# Altium PCB LED_Al.PcbDoc
Units mm, origin at the board's own origin, x right, y up, seen from the top; angles counter-clockwise.
Board outline 104.14 x 127 mm, 2 copper layers (Top Layer, Bottom Layer); 16 components, 29 nets, 82 pads, 0 vias.
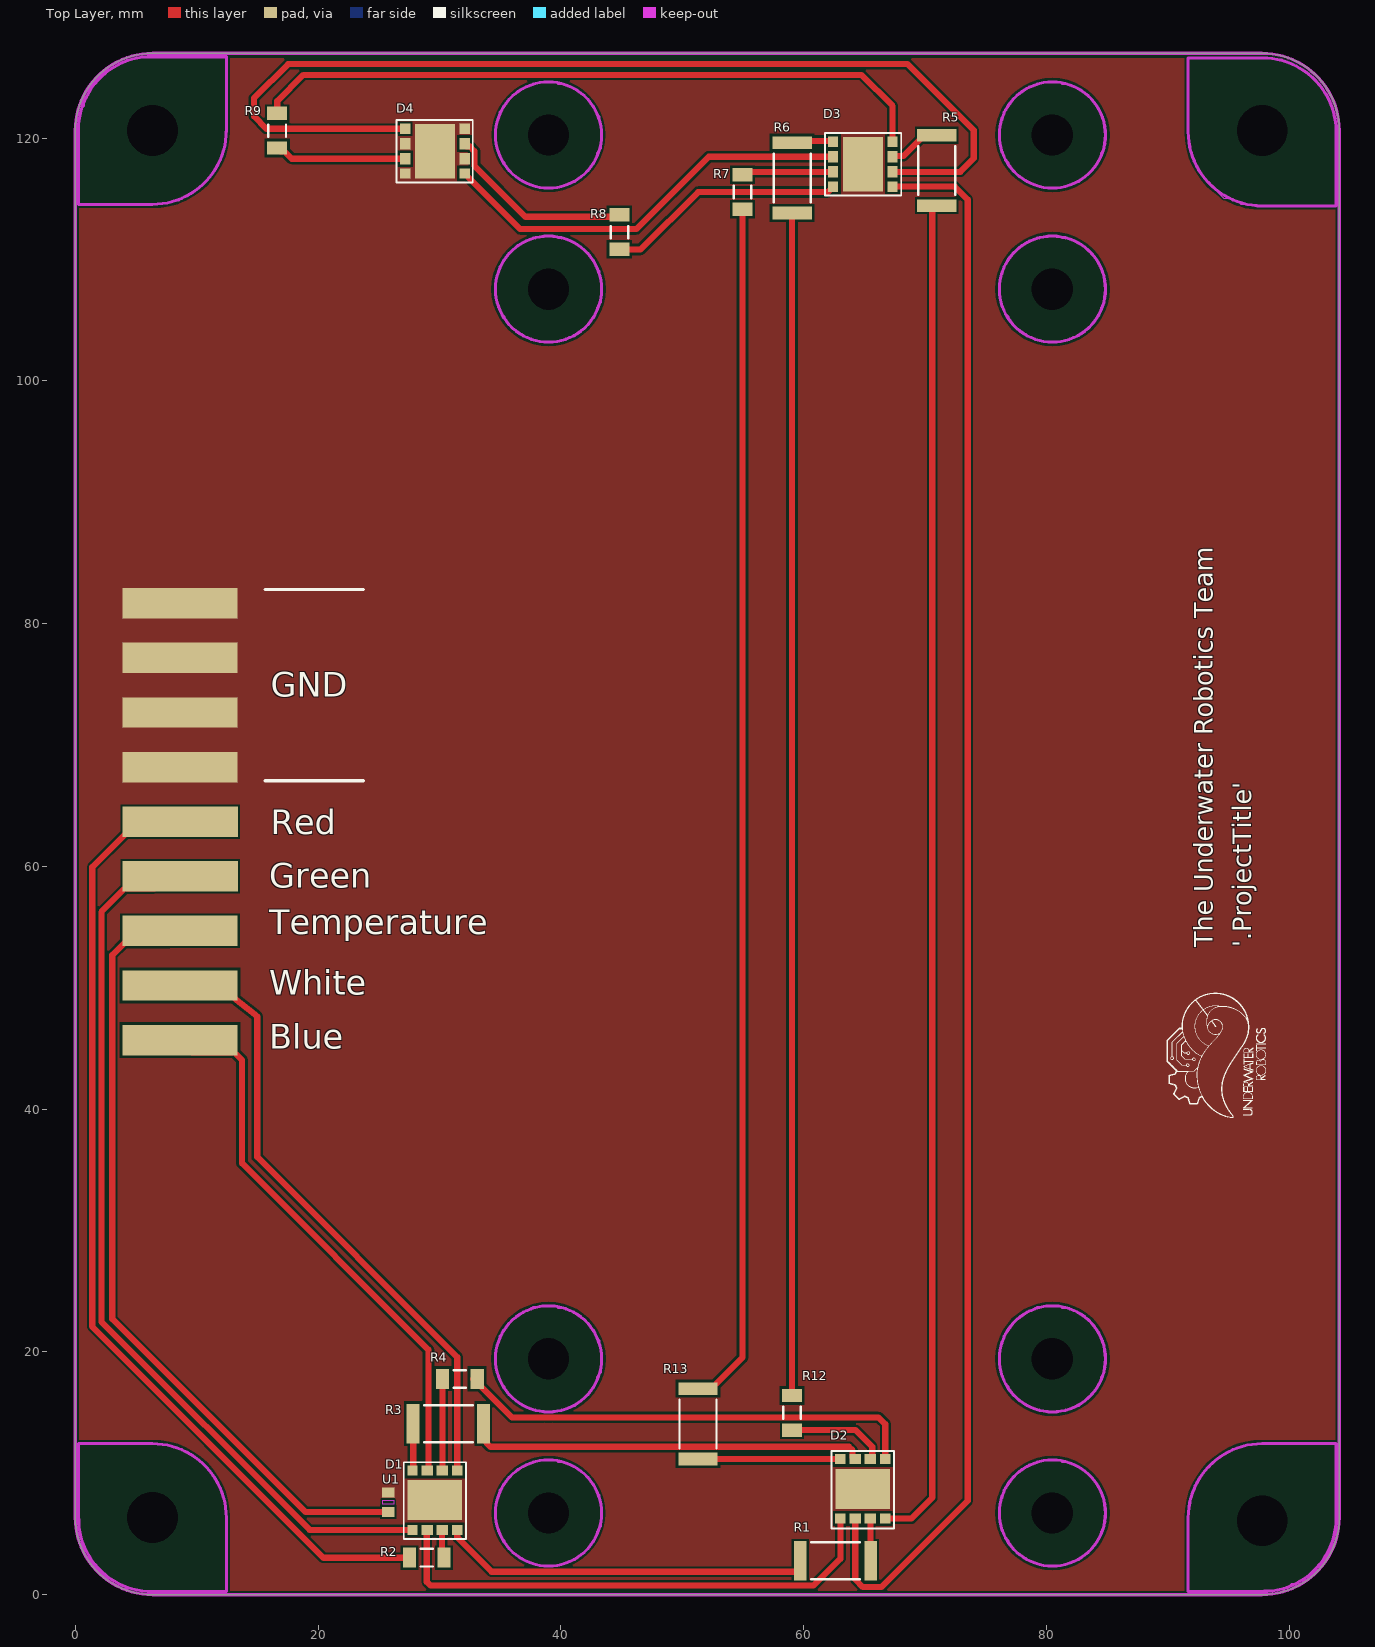
[diagram p0: Top Layer view]
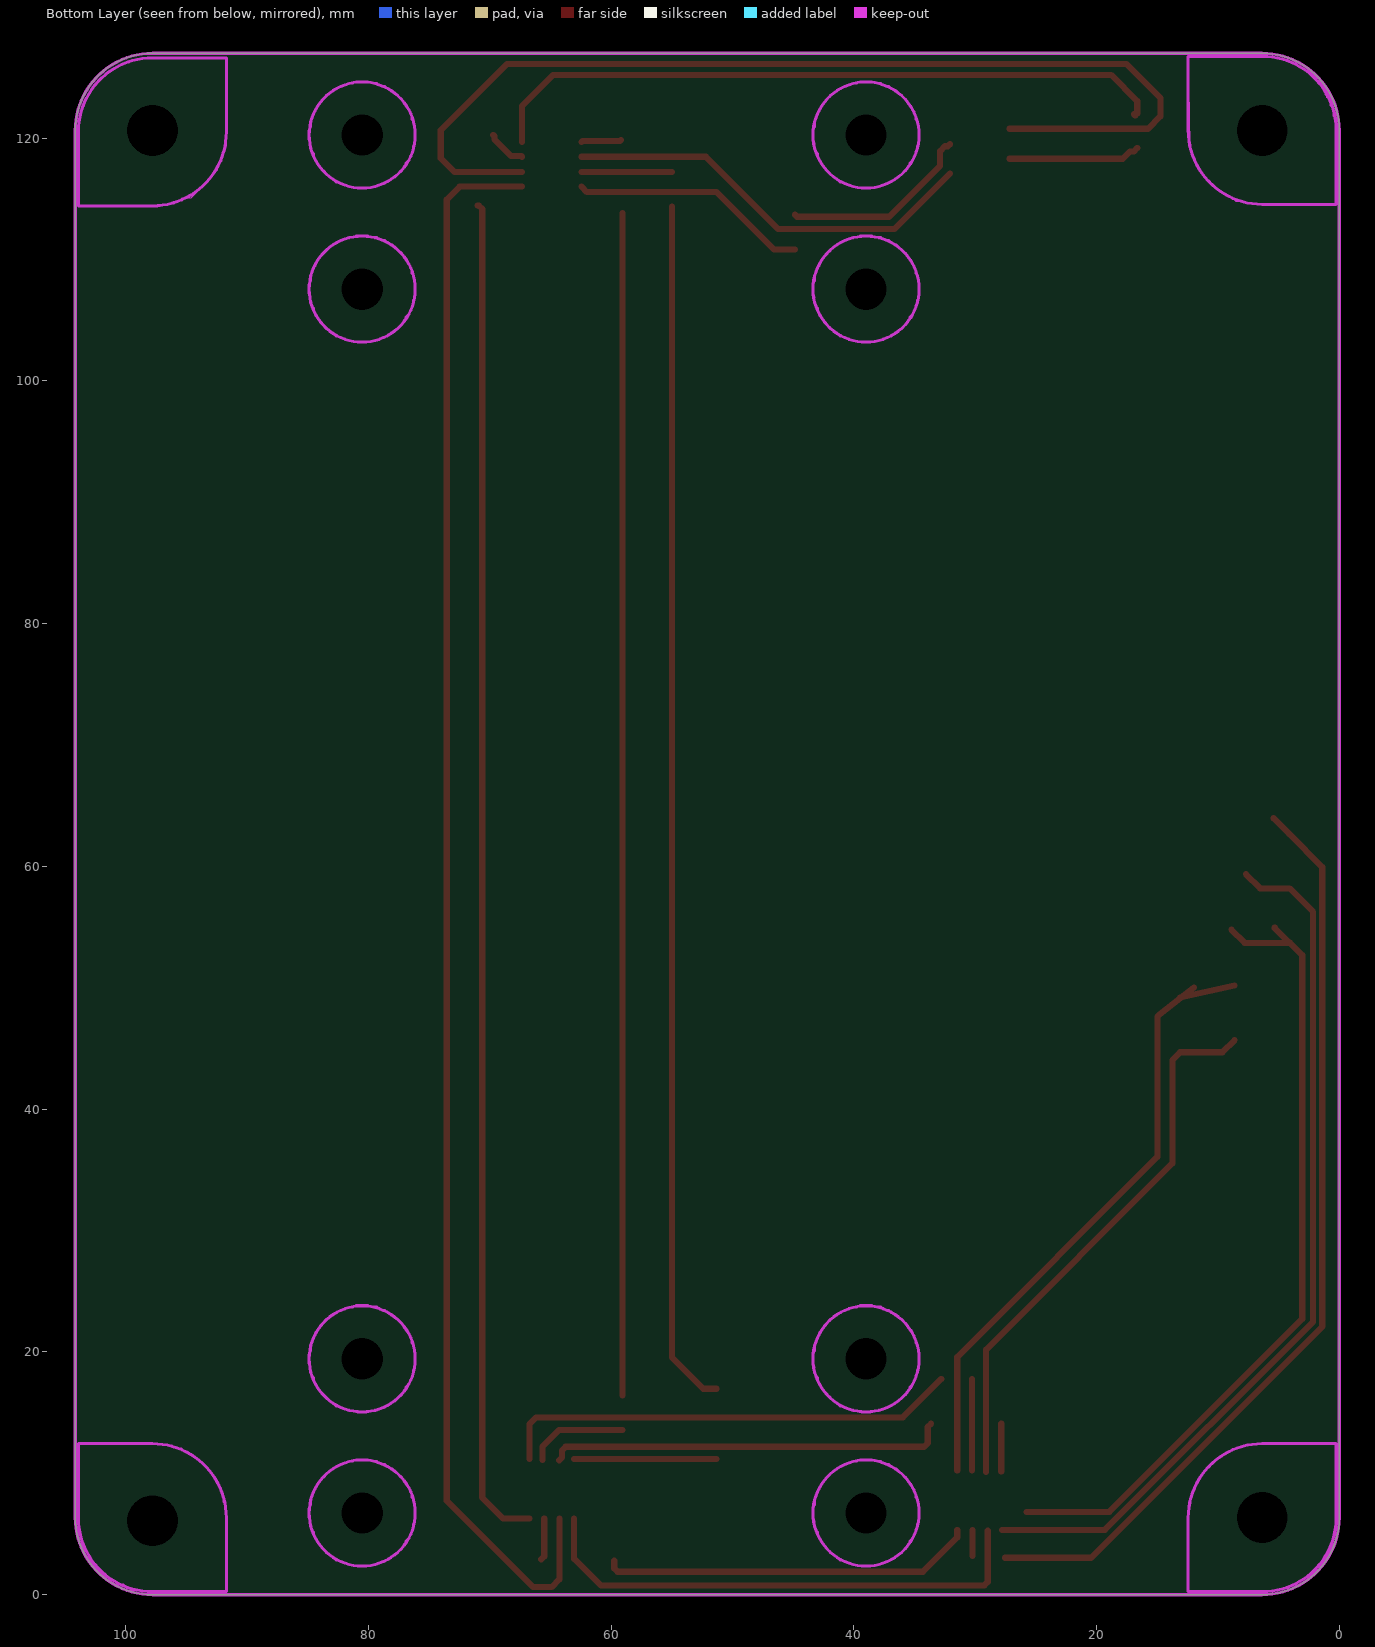
[diagram p1: Bottom Layer view, seen from below]

## Layer stack, top to bottom
Top Solder: solder mask 0.0102, Solder Resist, Dk 3.5
Top Layer: signal copper 0.0356
Dielectric 1: dielectric 0.32, FR-4, Dk 4.8
Bottom Layer: signal copper 0.0356
Bottom Solder: solder mask 0.0102, Solder Resist, Dk 3.5

## Board outline
0,6.35 0,120.65 cw(c6.35,120.65) 6.35,127 97.79,127 cw(c97.79,120.65) 104.14,120.65 104.14,6.35 cw(c97.79,6.35) 97.79,0 6.35,0 cw(c6.35,6.35)

## Design rules (kind name [scope] priority, off if disabled: settings)
AcuteAngle [All] p1: minimum=6.00000000000000E+0001 checktracksonly=FALSE
BoardOutlineClearance "BoardOutlineClearance JLCPCB" [All] p1: gap=0.2 ignorepadtopadclearanceinfootprint=FALSE
Clearance "Clearance JLCPCB 4 layer" [All] p1: gap=0.2 ignorepadtopadclearanceinfootprint=FALSE except(0.09: Arc-Arc Arc-Track Track-Track; 0.127: Arc-SMDPad Track-SMDPad SMDPad-SMDPad; 0.254: Arc-Hole Track-Hole SMDPad-Hole THPad-Hole Via-Hole Fill-Hole Poly-Hole Region-Hole Text-Hole)
DiffPairsRouting [All] p1: maxlimit=0.254 minlimit=0.152 mostfreqgap=0.203 toplayer_minwidth=0.09 toplayer_maxwidth=0.381 toplayer_prefwidth=0.203 bottomlayer_minwidth=0.09 bottomlayer_maxwidth=0.381 bottomlayer_prefwidth=0.203 maxuncoupledlength=12.7
HoleSize "HoleSize JLCPCB Pad" [IsPad] p1: absolutevalues=TRUE maxlimit=6.3 minlimit=0.5 maxpercent=80.000 minpercent=20.000
HoleSize "HoleSize JLCPCB 4 layer" [All] p2: absolutevalues=TRUE maxlimit=6.3 minlimit=0.2 maxpercent=80.000 minpercent=20.000
HoleToHoleClearance "HoleToHoleClearance JLCPCB" [All] p1: gap=0.254 allowstackedmicrovias=TRUE
MinimumAnnularRing "MinimumAnnularRing JLCPCB Pad" [IsPad] p1: minimumring=0.3
MinimumAnnularRing "MinimumAnnularRing JLCPCB 1oz" [All] p2: minimumring=0.13
MinimumSolderMaskSliver [All] p1: minsoldermaskwidth=0.025
PlaneConnect [All] p1: pad.planeconnectstyle=Relief pad.reliefexpansion=0.508 pad.reliefentries=4 pad.reliefconductorwidth=0.254 pad.reliefairgap=0.254 via.planeconnectstyle=Direct via.reliefexpansion=0.508 via.reliefentries=4 via.reliefconductorwidth=0.254 via.reliefairgap=0.254
PolygonConnect [All] p1: connectstyle=Direct reliefconductorwidth=0.381 reliefentries=4 polygonreliefangle="45 Angle" airgapwidth=0.254
RoutingVias "RoutingVias JLCPCB 4 layer" [All] p1: holewidth=0.5 width=1 viastyle="Through Hole" minholewidth=0.2 minwidth=0.4 maxholewidth=1.27 maxwidth=2.032
SilkToSilkClearance [All] p1: silktosilkclearance=0.076
SilkToSolderMaskClearance "SilkToSolderMaskClearance JLCPCB" [IsPad] p1: minsilkscreentomaskgap=0.15 clearancetoexposedcopper=TRUE
SolderMaskExpansion "SolderMaskExpansion JLCPCB" [All] p1: expansion=0.05 istentingtop=FALSE
Width "Width JLCPCB 4 layer" [All] p1: maxlimit=5 minlimit=0.09 preferedwidth=0.508 bottomlayer_prefwidth=0.25 minimp=50.000000 maximp=50.000000 favimp=50.000000
23 further rules are at their usual default settings.

## Components (designator, comment, footprint, x,y, rotation, side; value= is the part's Value field where it differs from the comment)
D1 "LE_RTDUW_S2WM" LE_RTDUW_S2WM 29.629,7.785 r0 top
D2 "LE_RTDUW_S2WM" LE_RTDUW_S2WM 64.883,8.725 r0 top
D3 "LE_RTDUW_S2WM" LE_RTDUW_S2WM 64.883,117.856 r90 top
D4 "LE_RTDUW_S2WM" LE_RTDUW_S2WM 29.629,118.933 r270 top
R1 "Jumper 2512(6432)" RESC2512(6432)_L 62.632,2.794 r180 top value="0.00 Ohm"
R2 "ERJ-8GEY0R00V" RESC3216X70X50NL05T20 28.956,3.048 r0 top
R3 "Jumper 2512(6432)" RESC2512(6432)_L 30.734,14.097 r0 top value="0.00 Ohm"
R4 "ERJ-8GEY0R00V" RESC3216X70X50NL05T20 31.679,17.78 r0 top
R5 "Jumper 2512(6432)" RESC2512(6432)_L 70.979,117.348 r270 top value="0.00 Ohm"
R6 "Jumper 2512(6432)" RESC2512(6432)_L 59.055,116.734 r90 top value="0.00 Ohm"
R7 "ERJ-8GEY0R00V" RESC3216X70X50NL05T20 54.977,115.57 r90 top
R8 "ERJ-8GEY0R00V" RESC3216X70X50NL05T20 44.831,112.268 r90 top
R9 "ERJ-8GEY0R00V" RESC3216X70X50NL05T20 16.637,120.622 r90 top
R12 "ERJ-8GEY0R00V" RESC3216X70X50NL05T20 59.055,14.986 r90 top
R13 "Jumper 2512(6432)" RESC2512(6432)_L 51.308,14.076 r90 top value="0.00 Ohm"
U1 "NTCS0603E3223FMT" NTCS0603_VIS 25.781,7.62 r90 top

## Footprints (in the part's own frame and the unit in brackets; to place one, negate y for a bottom-side part, rotate by r counter-clockwise, add the part's x,y. Pads: shape width x height; smd on the part's side, far side on the other; paste and mask are expansions set on the pad)
LE_RTDUW_S2WM [mil]
  rect 33.5x33.5 smd: 1(72.6,-96.5) 4(-72.6,-96.5) 5(-72.6,96.5) 8(72.6,96.5)
  rect 37.4x33.5 smd: 2(24.6,-96.5) 3(-24.6,-96.5) 6(-24.6,96.5) 7(24.6,96.5)
  rect 177.17x129.92 smd: 9(0,0)
  silkscreen extent -101,-125 101,123, body extent -93,-113 91,113, height 52
NTCS0603_VIS [mm]
  rect 0.8x1 smd paste+0 mask+0: 1(-0.8,0) 2(0.8,0)
  Top Layer keep-out region: -0.176,-0.441 -0.176,0.457 0.168,0.457 0.168,-0.441
  body extent -0.88,-0.47 0.88,0.47, height 0.94
RESC2512(6432)_L [mm] "Chip Resistor, Body 6.4x3.2mm, IPC High Density"
  rect 1.05x3.25 smd: 1(-2.9,0) 2(2.9,0)
  silkscreen extent -2,-1.52 2,1.53, body extent -3.25,-1.7 3.25,1.7, height 0.75
RESC3216X70X50NL05T20 [mm] "Chip Resistor, 2-Leads, Body 3.20x1.60mm, IPC Medium Density"
  rect 1.1x1.65 smd: 1(-1.425,0) 2(1.425,0)
  silkscreen extent -0.5,-0.72 0.5,0.72, body extent -1.63,-0.82 1.62,0.82, height 0.7

## Part data
D1 D2 D3 D4: "LED OSTAR RGBW 625/527/453NM SMD", Supplier Part Number 1=720-LERTDUWS2WMA2120, Supplier 1=Mouser
R1 R3 R5 R6 R13: library part CMP-1018-00001-1, "Jumper 2512 (6432 Metric)", Case-EIA=2512, Case-Metric=6432, Power=None, Technology=SMT, Tolerance=None
R2 R4 R7 R8 R9 R12: library part CMP-2003-00541-1, Manufacturer=Panasonic, Part Number=ERJ-8GEY0R00V
U1: library part CMP-00030-42631939-1, "NTCS0603E3223FMT Thermistor NTC 22K Ohm 1% 2-Pin 0603 Surface Mount Solder Pad 3730K -4.5 to -4 T/R Automotive", Case Code (Imperial)=0603, Case Code (Metric)=1608, Max Operating Temperature=150°C, Min Operating Temperature=-40°C, Power Dissipation=125mW, Resistance=22kΩ, Tolerance=1%, Accuracy=1%, Case/Package=0603, Contact Plating=Tin, Depth=800µm, Height=800µm, Length=1.6mm, Mount="Surface Mount", NexarPartId=42631939, Number of Pins=2, Power Rating=125mW, Radiation Hardening=No, REACH SVHC=Unknown, RoHS=Compliant, Schedule B="8533400080, 8533400080", Termination=SMD/SMT, Width=1.6mm

## Free pads (board coordinates)
  round 0 hole 4.191 unplated: 1(6.35,6.35) 1(6.35,120.65) 1(97.79,6.096) 1(97.79,120.65)
  round 0 hole 3.404 unplated: 1(38.989,6.731) 1(38.989,19.431) 1(38.989,107.569) 1(38.989,120.269) 1(80.505,6.731) 1(80.505,19.431) 1(80.505,107.569) 1(80.505,120.269)
  rect 9.5x2.5 smd: 2(8.629,45.696) 2(8.63,50.196) 2(8.633,54.695) 2(8.634,81.687) 2(8.634,77.188) 2(8.635,72.688) 2(8.635,68.189) 2(8.636,63.69) 2(8.636,63.69) 2(8.637,59.191)

## Nets (pads, with @x,y where several pads share a name; then routed paths per layer and width w, separated by ;. In a path a pad name is that pad's centre, name@x,y a point inside that pad or via, vN(x,y) a via of type N, cw(c..) or ccw(c..) an arc to the next point about the centre after c; other vN are vias at no path point)
"Blue Anode": D1.6 pad.2@8.629,45.696 | length 46.1
  Top Layer w0.508: pad.2@8.629,45.696 9.625,44.7 13.125,44.7 13.125,44.66 13.74,44.045 13.74,35.536 29.093,20.183 D1.6@29.093,10.116
"Blue D1D2": D2.6 R3.2 | length 33
  Top Layer w0.508: R3.2 33.905,13.826 33.905,12.49 34.203,12.192 63.74,12.192 64.037,11.894 64.037,11.308 D2.6@64.262,11.084
"Blue D2D3": D3.6 R7.2 | length 7.5
  Top Layer w0.508: R7.2@54.977,117.231 D3.6
"Blue D3D4": D4.6 R8.2 | length 16
  Top Layer w0.508: D4.6@32.08,119.508 32.252,119.337 32.491,119.337 32.887,118.941 32.887,117.735 37.084,113.538 44.676,113.538 R8.2
GND: D1.9 D2.9 D3.9 D4.1 D4.3 D4.5 D4.7 D4.9 pad.2@8.634,77.188 pad.2@8.634,81.687 pad.2@8.635,68.189 pad.2@8.635,72.688 U1.2
"Green Anode": D1.4 pad.2@8.637,59.191 | length 73.3
  Top Layer w0.508: pad.2@7.686,59.372 6.509,58.195 4.093,58.195 2.159,56.261 2.159,22.479 19.304,5.334 D1.4
"Green D1D2": D1.3 D2.4 | length 42.6
  Top Layer w0.508: D1.3@28.956,5.264 28.956,1.06 29.254,0.762 60.833,0.762 63.039,2.968 D2.4
"Green D2D3": D2.3 D3.4 | length 131.3
  Top Layer w0.508: D2.3 64.258,1.274 64.897,0.635 66.421,0.635 73.533,7.747 73.533,114.952 72.473,116.012 D3.4
"Green D3D4": D3.3 D4.4 | length 86.6
  Top Layer w0.508: D4.4 15.748,120.777 14.732,121.793 14.732,123.317 17.526,126.111 68.58,126.111 74.027,120.664 74.027,118.35 72.908,117.231 D3.3
NetD1_1: D1.1 R1.2 | length 30.8
  Top Layer w0.508: D1.1 31.473,4.722 34.305,1.89 59.461,1.89 59.732,2.161 R1.2
NetD1_2: D1.2 R2.2 | length 2.1
  Top Layer w0.508: R2.2@30.216,3.213 D1.2@30.216,5.334
NetD1_5: D1.5 R3.1 | length 4
  Top Layer w0.508: R3.1 27.849,14.082 D1.5@27.849,10.141
NetD1_7: D1.7 R4.1 | length 7.5
  Top Layer w0.508: D1.7 R4.1
NetD2_1: D2.1 R5.2 | length 111.3
  Top Layer w0.508: D2.1 68.885,6.274 70.612,8.001 70.612,114.177 70.883,114.448 R5.2
NetD2_5: D2.5 R13.1 | length 11.7
  Top Layer w0.508: R13.1 D2.5
NetD2_7: D2.7 R12.1 | length 8.3
  Top Layer w0.508: R12.1 64.29,13.561 65.659,12.192 D2.7@65.659,11.104
NetD3_1: D3.1 R9.2 | length 56.8
  Top Layer w0.508: R9.2 16.637,123.063 18.796,125.222 64.77,125.222 67.334,122.658 D3.1 ; R9.2@16.814,121.871 R9.2@16.917,121.974
NetD3_5: D3.5 R8.1 | length 19.7
  Top Layer w0.508: R8.1 46.581,110.843 51.308,115.57 61.99,115.57 D3.5
NetR6_1: R6.1 R12.2 | length 97.4
  Top Layer w0.508: R12.2 R6.1
NetR7_1: R7.1 R13.2 | length 99.6
  Top Layer w0.508: R13.2 52.408,16.976 54.969,19.537 54.977,19.537 R7.1 R7.1@54.977,114.371
"Red Anode": pad.2@8.636,63.69 R2.1 | length 77.6
  Top Layer w0.508: pad.2@5.424,63.971 5.417,63.971 4.14,62.694 4.14,62.687 1.397,59.944 1.397,22.098 20.447,3.048 R2.1
"Red D1D2": D2.2 R1.1 | length 3.5
  Top Layer w0.508: D2.2 65.508,3.157 R1.1@65.744,2.921
"Red D2D3": D3.2 R5.1 | length 3.3
  Top Layer w0.508: D3.2 67.383,118.53 68.224,118.53 69.608,119.914 69.608,120.168 R5.1@69.709,120.269
"Red D3D4": D4.2 R9.1 | length 10.9
  Top Layer w0.508: R9.1 16.933,118.901 17.243,118.901 17.836,118.308 D4.2
Temp: pad.2@8.633,54.695 U1.1 | length 67.8
  Top Layer w0.508: pad.2@4.106,53.699 7.789,53.699 pad.2@8.89,54.8 ; pad.2@5.321,54.978 5.321,54.915 4.137,53.731 4.074,53.731 3.048,52.705 3.048,22.727 18.955,6.82 U1.1
"White Anode": D1.8 pad.2@8.63,50.196 | length 52.7
  Top Layer w0.508: pad.2@8.63,50.196 pad.2@13.126,49.2 ; pad.2@11.956,50.041 13.089,49.153 14.815,47.8 14.986,47.63 14.986,36.068 31.473,19.581 D1.8
"White D1D2": D2.8 R4.2 | length 38.4
  Top Layer w0.508: R4.2@32.794,17.78 35.969,14.605 38.608,14.605 ccw(c38.989,19.431) 39.37,14.605 66.175,14.605 66.727,14.053 D2.8
"White D2D3": D3.8 R6.2 | length 3.3
  Top Layer w0.508: R6.2@59.168,119.867 59.251,119.784 61.574,119.784 62.348,119.784 D3.8
"White D3D4": D3.7 D4.8 | length 34.7
  Top Layer w0.508: D4.8 36.647,112.522 46.228,112.522 52.187,118.481 D3.7

## Polygon pours and split planes (outlines as drawn)
GND on Top Layer "GND_L01_P006" (solid, pour order 6): 0.05,126.585 0.05,6 6,0.05 98,0.05 104.14,6 104.14,126.585

## Keep-outs
Keep-Out Layer:
  circle w0.254: c38.989,120.269 r4.37
  circle w0.254: c38.989,107.569 r4.37
  circle w0.254: c80.505,107.569 r4.37
  circle w0.254: c80.505,120.269 r4.37
  circle w0.254: c38.989,19.431 r4.37
  circle w0.254: c38.989,6.731 r4.37
  circle w0.254: c80.505,6.731 r4.37
  circle w0.254: c80.505,19.431 r4.37
  region: 12.445,0.254 12.445,7.239 12.319,7.493 12.191,8.128 12.065,8.382 11.937,8.89 11.683,9.144 11.683,9.271 11.556,9.525 11.302,9.779 11.302,9.906 10.032,11.176 9.779,11.303 9.397,11.557 9.144,11.684 8.762,11.938 8.384,12.063 8,12.192 6.478,12.446 0.251,12.446 0.38,5.08 0.507,4.572 0.634,4.191 0.762,3.81 1.015,3.429 1.142,3.048 1.396,2.667 1.523,2.54 3.301,1.016 3.936,0.762 4.063,0.635 4.19,0.508 4.317,0.508 4.698,0.508 5.799,0.254
  region: 0.253,114.554 0.253,121.539 0.507,121.793 0.507,122.428 0.761,122.682 0.761,123.19 0.888,123.317 1.015,123.317 1.015,123.444 1.142,123.571 1.142,123.825 1.396,124.079 1.396,124.206 2.666,125.476 2.921,125.603 3.301,125.857 3.556,125.984 3.936,126.238 4.447,126.368 4.698,126.492 5.438,126.619 5.587,126.619 12.445,126.619 12.318,119.38 12.192,118.872 12.064,118.491 11.937,118.11 11.683,117.729 11.557,117.348 11.302,116.967 11.176,116.84 9.398,115.316 8.762,115.062 8.635,114.935 8.508,114.808 8.381,114.808 8.001,114.808 6.9,114.554
  region: 103.886,114.427 103.886,121.539 103.632,121.793 103.632,122.428 103.378,122.682 103.378,123.19 103.251,123.317 103.124,123.317 103.124,123.444 102.997,123.571 102.997,123.825 102.743,124.079 102.743,124.206 101.473,125.476 101.219,125.476 100.838,125.857 100.584,125.857 100.203,126.238 99.695,126.238 99.441,126.492 98.679,126.492 98.552,126.619 91.694,126.619 91.693,119.415 91.821,118.872 92.075,118.491 92.075,118.11 92.456,117.729 92.456,117.348 92.837,116.967 92.837,116.84 94.615,115.062 95.377,115.062 95.504,114.935 95.631,114.808 95.758,114.808 96.012,114.554 97.79,114.427
  region: 91.694,0.254 91.694,7.366 91.948,7.62 91.948,8.255 92.202,8.509 92.202,9.017 92.329,9.144 92.456,9.144 92.456,9.271 92.583,9.398 92.583,9.652 92.837,9.906 92.837,10.033 94.107,11.303 94.361,11.303 94.742,11.684 94.996,11.684 95.377,12.065 95.885,12.065 96.139,12.319 96.901,12.319 97.028,12.446 103.886,12.446 103.886,4.699 103.505,4.318 103.505,3.937 103.124,3.556 103.124,3.175 102.743,2.794 102.743,2.667 100.965,0.889 100.203,0.889 100.076,0.762 99.949,0.635 99.822,0.635 99.568,0.381 97.917,0.381 97.79,0.254
  region: 80.391,23.876 81.026,23.876 81.28,23.622 81.788,23.622 81.915,23.495 82.296,23.495 82.55,23.241 82.677,23.241 82.931,22.987 83.058,22.987 84.328,21.717 84.328,21.336 84.709,20.955 84.709,20.066 84.875,19.9 84.875,19.431 84.836,19.392 84.836,18.288 84.455,17.907 84.455,17.399 84.074,17.018 84.074,16.764 83.439,16.129 83.312,16.129 82.677,15.494 82.169,15.494 81.915,15.24 81.534,15.24 81.407,15.113 79.629,15.113 79.502,15.24 79.121,15.24 78.994,15.367 78.74,15.367 78.359,15.748 78.105,15.748 77.724,16.129 77.597,16.129 77.343,16.383 77.343,16.51 76.962,16.891 76.962,17.145 76.581,17.526 76.581,17.653 76.327,17.907 76.327,18.542 76.2,18.669 76.2,20.447 76.454,20.701 76.454,21.336 76.962,21.844 76.962,22.098 77.978,23.114 78.232,23.114 78.613,23.495 78.994,23.495 79.248,23.749 79.883,23.749 80.01,23.876
  region: 80.391,11.176 81.026,11.176 81.28,10.922 81.788,10.922 81.915,10.795 82.296,10.795 82.55,10.541 82.677,10.541 82.931,10.287 83.058,10.287 84.328,9.017 84.328,8.636 84.709,8.255 84.709,7.366 84.875,7.2 84.875,6.731 84.836,6.692 84.836,5.588 84.455,5.207 84.455,4.699 84.074,4.318 84.074,4.064 83.439,3.429 83.312,3.429 82.677,2.794 82.169,2.794 81.915,2.54 81.534,2.54 81.407,2.413 79.629,2.413 79.502,2.54 79.121,2.54 78.994,2.667 78.74,2.667 78.359,3.048 78.105,3.048 77.724,3.429 77.597,3.429 77.343,3.683 77.343,3.81 76.962,4.191 76.962,4.445 76.581,4.826 76.581,4.953 76.327,5.207 76.327,5.842 76.2,5.969 76.2,7.747 76.454,8.001 76.454,8.636 76.962,9.144 76.962,9.398 77.978,10.414 78.232,10.414 78.613,10.795 78.994,10.795 79.248,11.049 79.883,11.049 80.01,11.176
  region: 38.875,11.176 39.51,11.176 39.764,10.922 40.272,10.922 40.399,10.795 40.78,10.795 41.034,10.541 41.161,10.541 41.415,10.287 41.542,10.287 42.812,9.017 42.812,8.636 43.193,8.255 43.193,7.366 43.359,7.2 43.359,6.731 43.32,6.692 43.32,5.588 42.939,5.207 42.939,4.699 42.558,4.318 42.558,4.064 41.923,3.429 41.796,3.429 41.161,2.794 40.653,2.794 40.399,2.54 40.018,2.54 39.891,2.413 38.113,2.413 37.986,2.54 37.605,2.54 37.478,2.667 37.224,2.667 36.843,3.048 36.589,3.048 36.208,3.429 36.081,3.429 35.827,3.683 35.827,3.81 35.446,4.191 35.446,4.445 35.065,4.826 35.065,4.953 34.811,5.207 34.811,5.842 34.684,5.969 34.684,7.747 34.938,8.001 34.938,8.636 35.446,9.144 35.446,9.398 36.462,10.414 36.716,10.414 37.097,10.795 37.478,10.795 37.732,11.049 38.367,11.049 38.494,11.176
  region: 38.875,23.876 39.51,23.876 39.764,23.622 40.272,23.622 40.399,23.495 40.78,23.495 41.034,23.241 41.161,23.241 41.415,22.987 41.542,22.987 42.812,21.717 42.812,21.336 43.193,20.955 43.193,20.066 43.359,19.9 43.359,19.431 43.32,19.392 43.32,18.288 42.939,17.907 42.939,17.399 42.558,17.018 42.558,16.764 41.923,16.129 41.796,16.129 41.161,15.494 40.653,15.494 40.399,15.24 40.018,15.24 39.891,15.113 38.113,15.113 37.986,15.24 37.605,15.24 37.478,15.367 37.224,15.367 36.843,15.748 36.589,15.748 36.208,16.129 36.081,16.129 35.827,16.383 35.827,16.51 35.446,16.891 35.446,17.145 35.065,17.526 35.065,17.653 34.811,17.907 34.811,18.542 34.684,18.669 34.684,20.447 34.938,20.701 34.938,21.336 35.446,21.844 35.446,22.098 36.462,23.114 36.716,23.114 37.097,23.495 37.478,23.495 37.732,23.749 38.367,23.749 38.494,23.876
  region: 38.875,124.714 39.51,124.714 39.764,124.46 40.272,124.46 40.399,124.333 40.78,124.333 41.034,124.079 41.161,124.079 41.415,123.825 41.542,123.825 42.812,122.555 42.812,122.174 43.193,121.793 43.193,120.904 43.359,120.738 43.359,120.269 43.32,120.23 43.32,119.126 42.939,118.745 42.939,118.237 42.558,117.856 42.558,117.602 41.923,116.967 41.796,116.967 41.161,116.332 40.653,116.332 40.399,116.078 40.018,116.078 39.891,115.951 38.113,115.951 37.986,116.078 37.605,116.078 37.478,116.205 37.224,116.205 36.843,116.586 36.589,116.586 36.208,116.967 36.081,116.967 35.827,117.221 35.827,117.348 35.446,117.729 35.446,117.983 35.065,118.364 35.065,118.491 34.811,118.745 34.811,119.38 34.684,119.507 34.684,121.285 34.938,121.539 34.938,122.174 35.446,122.682 35.446,122.936 36.462,123.952 36.716,123.952 37.097,124.333 37.478,124.333 37.732,124.587 38.367,124.587 38.494,124.714
  region: 38.875,112.014 39.51,112.014 39.764,111.76 40.272,111.76 40.399,111.633 40.78,111.633 41.034,111.379 41.161,111.379 41.415,111.125 41.542,111.125 42.812,109.855 42.812,109.474 43.193,109.093 43.193,108.204 43.359,108.038 43.359,107.569 43.32,107.53 43.32,106.426 42.939,106.045 42.939,105.537 42.558,105.156 42.558,104.902 41.923,104.267 41.796,104.267 41.161,103.632 40.653,103.632 40.399,103.378 40.018,103.378 39.891,103.251 38.113,103.251 37.986,103.378 37.605,103.378 37.478,103.505 37.224,103.505 36.843,103.886 36.589,103.886 36.208,104.267 36.081,104.267 35.827,104.521 35.827,104.648 35.446,105.029 35.446,105.283 35.065,105.664 35.065,105.791 34.811,106.045 34.811,106.68 34.684,106.807 34.684,108.585 34.938,108.839 34.938,109.474 35.446,109.982 35.446,110.236 36.462,111.252 36.716,111.252 37.097,111.633 37.478,111.633 37.732,111.887 38.367,111.887 38.494,112.014
  region: 80.391,124.714 81.026,124.714 81.28,124.46 81.788,124.46 81.915,124.333 82.296,124.333 82.55,124.079 82.677,124.079 82.931,123.825 83.058,123.825 84.328,122.555 84.328,122.174 84.709,121.793 84.709,120.904 84.875,120.738 84.875,120.269 84.836,120.23 84.836,119.126 84.455,118.745 84.455,118.237 84.074,117.856 84.074,117.602 83.439,116.967 83.312,116.967 82.677,116.332 82.169,116.332 81.915,116.078 81.534,116.078 81.407,115.951 79.629,115.951 79.502,116.078 79.121,116.078 78.994,116.205 78.74,116.205 78.359,116.586 78.105,116.586 77.724,116.967 77.597,116.967 77.343,117.221 77.343,117.348 76.962,117.729 76.962,117.983 76.581,118.364 76.581,118.491 76.327,118.745 76.327,119.38 76.2,119.507 76.2,121.285 76.454,121.539 76.454,122.174 76.962,122.682 76.962,122.936 77.978,123.952 78.232,123.952 78.613,124.333 78.994,124.333 79.248,124.587 79.883,124.587 80.01,124.714
  region: 80.391,112.014 81.026,112.014 81.28,111.76 81.788,111.76 81.915,111.633 82.296,111.633 82.55,111.379 82.677,111.379 82.931,111.125 83.058,111.125 84.328,109.855 84.328,109.474 84.709,109.093 84.709,108.204 84.875,108.038 84.875,107.569 84.836,107.53 84.836,106.426 84.455,106.045 84.455,105.537 84.074,105.156 84.074,104.902 83.439,104.267 83.312,104.267 82.677,103.632 82.169,103.632 81.915,103.378 81.534,103.378 81.407,103.251 79.629,103.251 79.502,103.378 79.121,103.378 78.994,103.505 78.74,103.505 78.359,103.886 78.105,103.886 77.724,104.267 77.597,104.267 77.343,104.521 77.343,104.648 76.962,105.029 76.962,105.283 76.581,105.664 76.581,105.791 76.327,106.045 76.327,106.68 76.2,106.807 76.2,108.585 76.454,108.839 76.454,109.474 76.962,109.982 76.962,110.236 77.978,111.252 78.232,111.252 78.613,111.633 78.994,111.633 79.248,111.887 79.883,111.887 80.01,112.014
  lines w0.254: 0,6.35 ccw(c6.35,6.35) 6.35,0 97.79,0 ccw(c97.79,6.35) 104.14,6.35 104.14,120.65 ccw(c97.79,120.65) 97.79,127 6.35,127 ccw(c6.35,120.65) 0,120.65 0,6.35 ; 0.254,6.35 ccw(c6.35,6.35) 6.35,0.254 12.446,0.254 12.446,6.35 ccw(c6.35,6.35) 6.35,12.446 2.032,12.446 0.254,12.446 0.254,6.35 ; 0.254,114.554 0.254,116.332 0.254,120.65 cw(c6.35,120.65) 6.35,126.746 12.446,126.746 12.446,120.65 cw(c6.35,120.65) 6.35,114.554 0.254,114.554 ; 91.694,0.254 91.694,6.35 cw(c97.79,6.35) 97.79,12.446 103.886,12.446 103.886,6.35 cw(c97.79,6.35) 97.79,0.254 91.694,0.254 ; 91.694,120.523 ccw(c97.79,120.523) 97.79,114.427 103.886,114.427 103.886,120.523 ccw(c97.79,120.523) 97.79,126.619 93.472,126.619 91.694,126.619 91.694,120.523

## Silkscreen, mask and mechanical layers (free items; w line width, h text height)
Top Overlay:
  drawing of 21 lines, arcs and shapes, not listed
  text "GND" at 16.097,73.977 h2
  text "Red" at 16.097,62.674 h2
  text "Green" at 15.978,58.266 h2
  text "Temperature" at 15.998,54.427 h2
  text "The Underwater Robotics Team" at 93.726,53.34 h1.52 r90
  text "'.ProjectTitle'" at 96.901,53.34 h1.52 r90
  text "White" at 15.998,49.422 h2
  text "Blue" at 15.975,45.001 h2